# Altium PCB PCB1.PcbDoc
Units mil, origin at the board's own origin, x right, y up, seen from the top; angles counter-clockwise.
Board outline 6000 x 4000 mil, 2 copper layers (Top Layer, Bottom Layer); 4 components, 15 nets, 67 pads, 0 vias.
Unrouted connection lines stored in the file: 8.
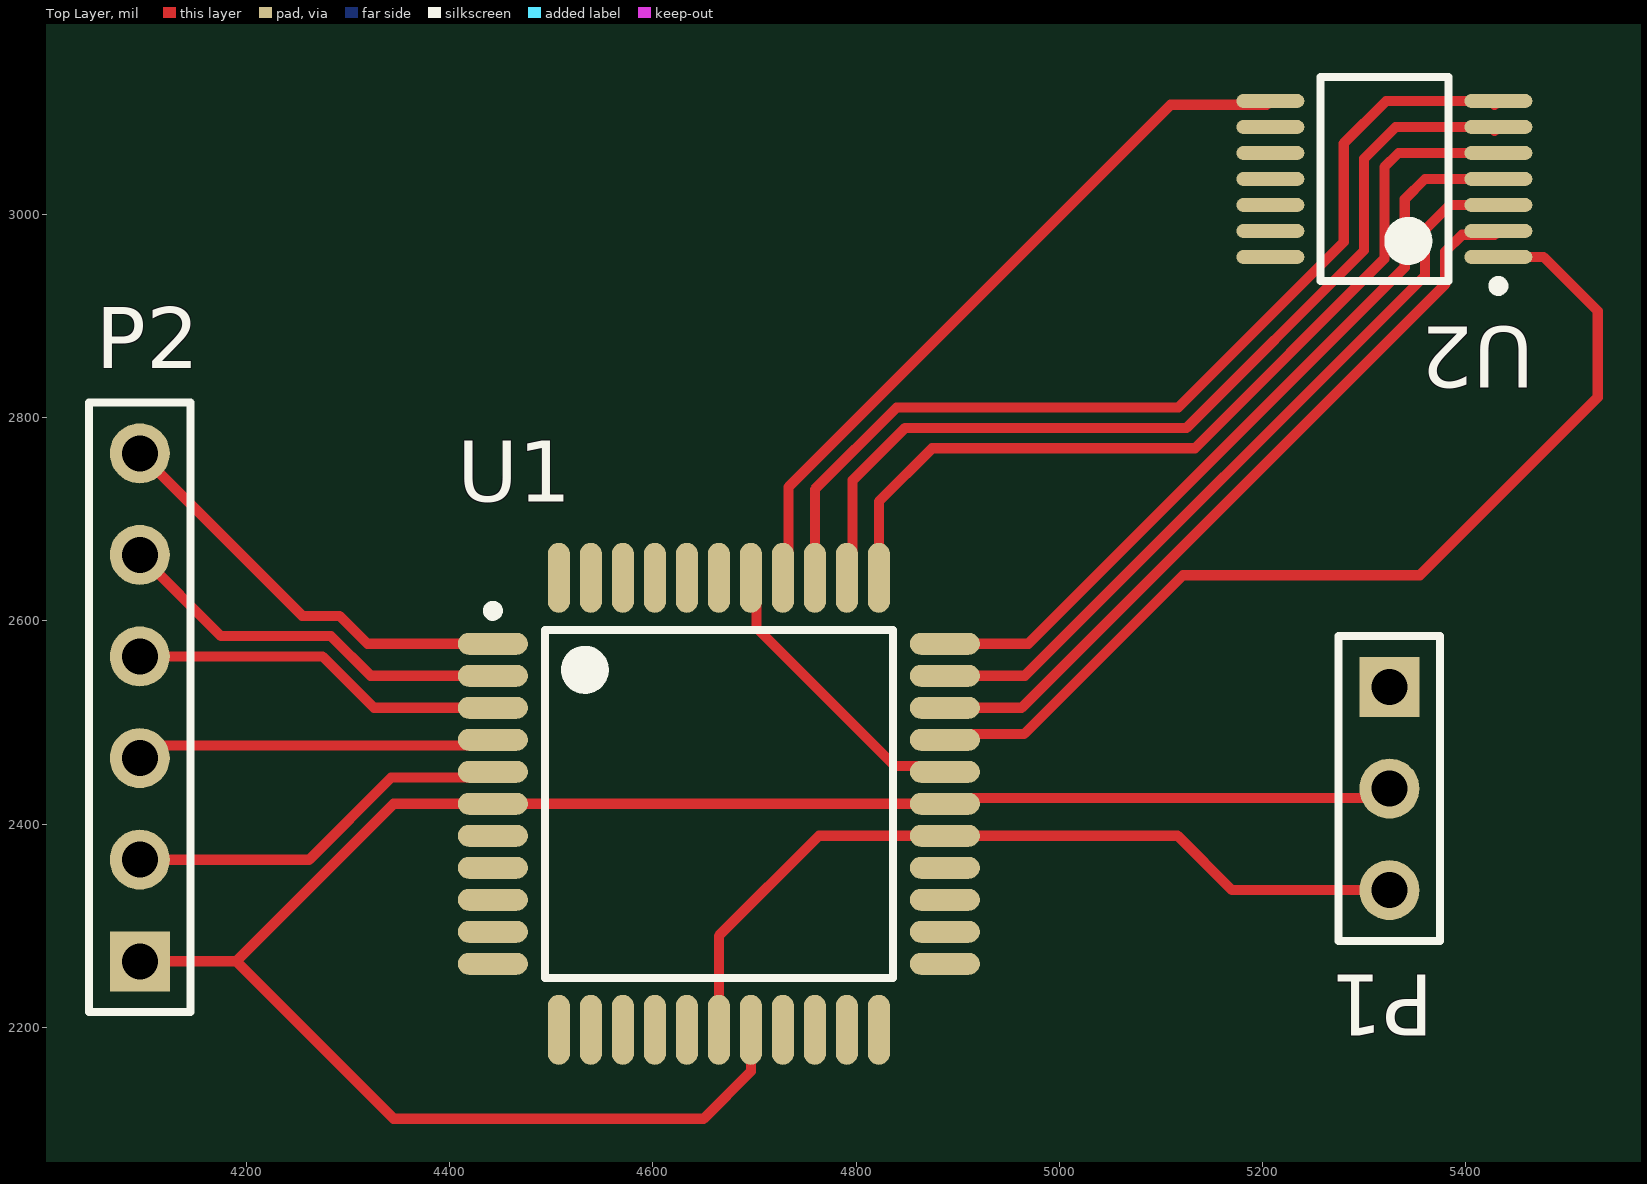
[diagram p0: Top Layer view]
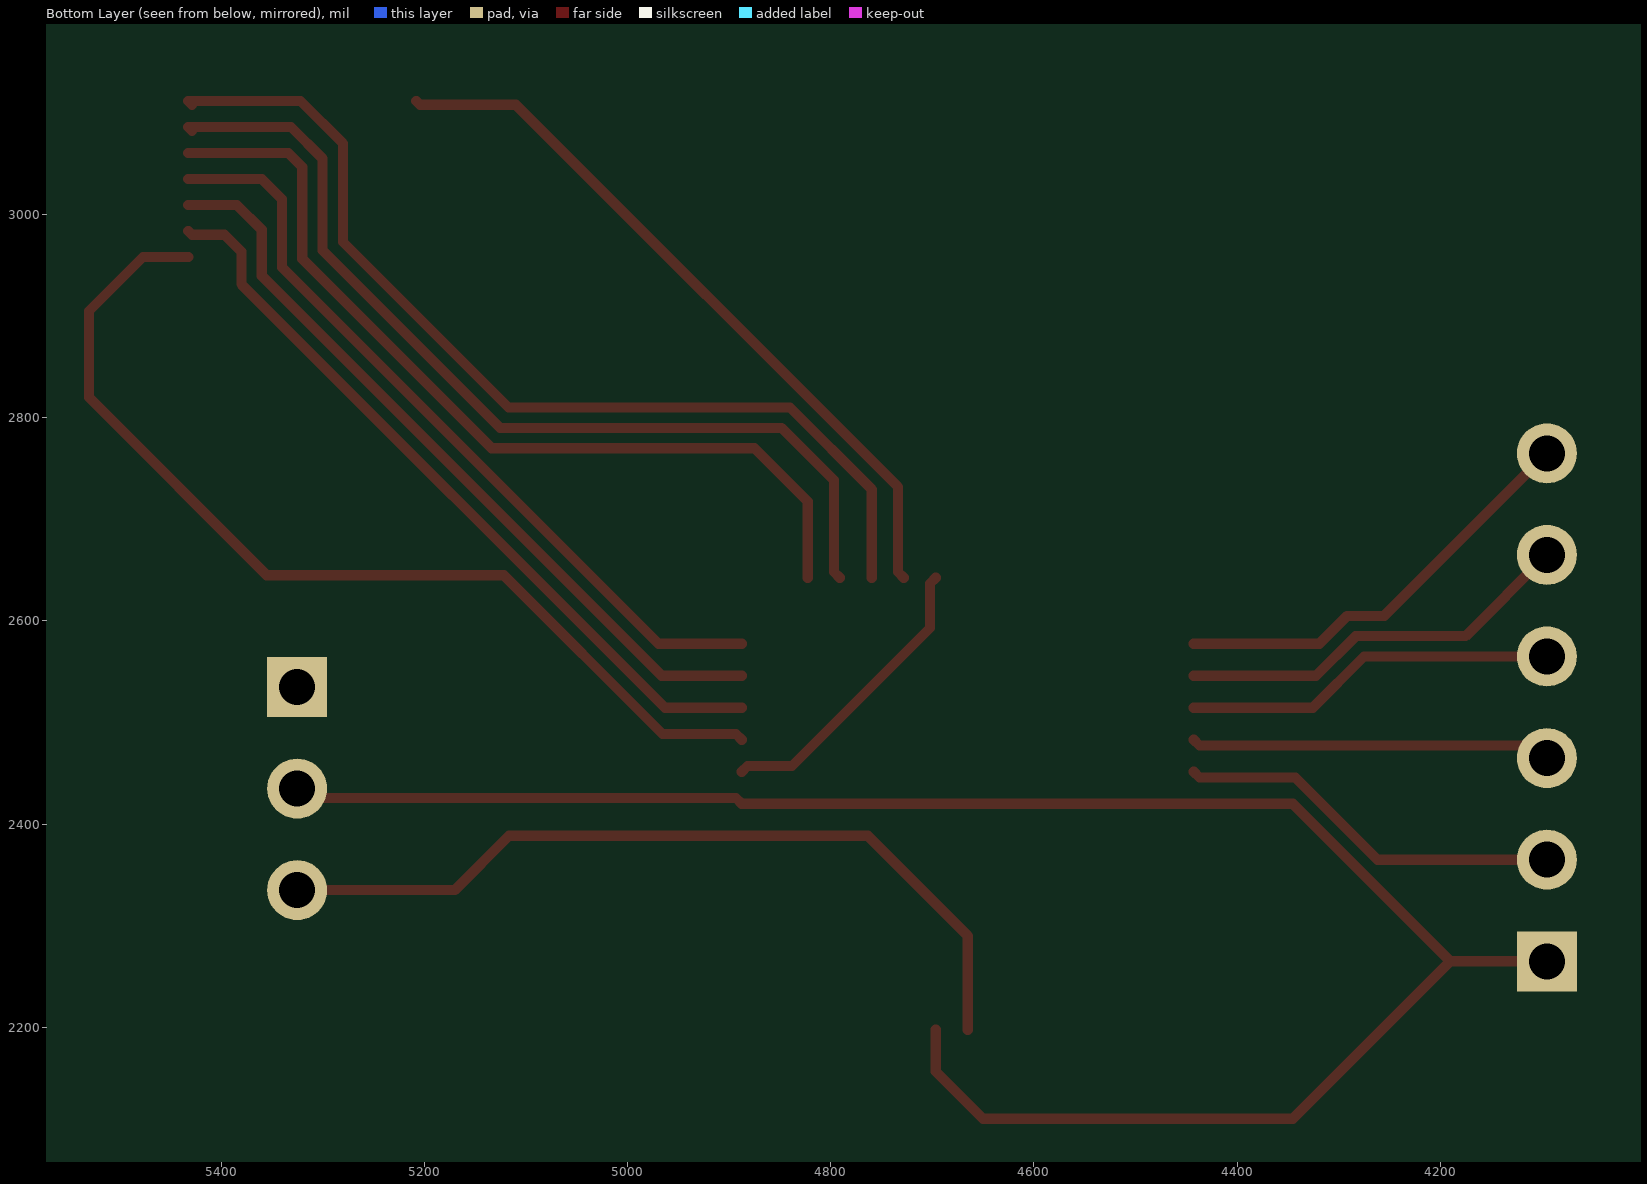
[diagram p1: Bottom Layer view, seen from below]

## Layer stack, top to bottom
Top Solder: solder mask 0.4, Solder Resist, Dk 3.5
Top Layer: signal copper 1.4
Dielectric 1: dielectric 12.6, FR-4, Dk 4.8
Bottom Layer: signal copper 1.4
Bottom Solder: solder mask 0.4, Solder Resist, Dk 3.5

## Board outline
1000,1000 7000,1000 7000,5000 1000,5000

## Design rules (kind name [scope] priority, off if disabled: settings)
Clearance [All] p1: gap=10 ignorepadtopadclearanceinfootprint=FALSE except(0: Arc-Hole Track-Hole SMDPad-Hole THPad-Hole Via-Hole Fill-Hole Poly-Hole Region-Hole Text-Hole)
PolygonConnect [All] p1: connectstyle=Relief reliefconductorwidth=10 reliefentries=4 polygonreliefangle="90 Angle" airgapwidth=10
RoomDefinition Sheet1 [InComponentClass('Sheet1')] p1: confinementstyle=ConfineIn formatcopy=TRUE lockcomponents=FALSE outline 7045,990 8290,990 8290,1710 7045,1710
RoutingVias [All] p1: holewidth=28 width=50 viastyle="Through Hole" minholewidth=28 minwidth=50 maxholewidth=28 maxwidth=50
SolderMaskExpansion [All] p1: expansion=4
Width [All] p1: maxlimit=10 minlimit=10 preferedwidth=10
30 further rules are at their usual default settings.

## Components (designator, comment, footprint, x,y, rotation, side; value= is the part's Value field where it differs from the comment)
P1 "Header 3" HDR1X3 5325,2535 r270 top
P2 "Header 6" HDR1X6 4095,2265 r90 top
U1 "ATmega16-16AC" 44A_N 4665,2420 r0 top
U2 "DAC-8" SOT402-1_N 5320,3035 r180 top

## Footprints (in the part's own frame and the unit in brackets; to place one, negate y for a bottom-side part, rotate by r counter-clockwise, add the part's x,y. Pads: shape width x height; smd on the part's side, far side on the other; paste and mask are expansions set on the pad)
44A_N [mm] "Thin QFP, 44-Leads, Body 10x10mm, Pitch 0.8mm, IPC Medium Density"
  oval 1.75x0.55 smd: 1(-5.65,4) 2(-5.65,3.2) 3(-5.65,2.4) 4(-5.65,1.6) 5(-5.65,0.8) 6(-5.65,0) 7(-5.65,-0.8) 8(-5.65,-1.6) 9(-5.65,-2.4) 10(-5.65,-3.2) 11(-5.65,-4) 23(5.65,-4) 24(5.65,-3.2) 25(5.65,-2.4) 26(5.65,-1.6) 27(5.65,-0.8) 28(5.65,0) 29(5.65,0.8) 30(5.65,1.6) 31(5.65,2.4) 32(5.65,3.2) 33(5.65,4)
  oval 0.55x1.75 smd: 12(-4,-5.65) 13(-3.2,-5.65) 14(-2.4,-5.65) 15(-1.6,-5.65) 16(-0.8,-5.65) 17(0,-5.65) 18(0.8,-5.65) 19(1.6,-5.65) 20(2.4,-5.65) 21(3.2,-5.65) 22(4,-5.65) 34(4,5.65) 35(3.2,5.65) 36(2.4,5.65) 37(1.6,5.65) 38(0.8,5.65) 39(0,5.65) 40(-0.8,5.65) 41(-1.6,5.65) 42(-2.4,5.65) 43(-3.2,5.65) 44(-4,5.65)
  silkscreen extent -5.77,-4.35 4.35,4.95, body extent -5,-5 5,5, height 1.2
HDR1X3 [mm] "Connector; Header; 3 Position"
  rect 1.5x1.5 hole 0.9: 1(0,0)
  round 1.5 hole 0.9: 2(2.54,0) 3(5.08,0)
  silkscreen extent -1.27,-1.27 6.35,1.27
HDR1X6 [mm] "Connector; Header; 6 Position"
  rect 1.5x1.5 hole 0.9: 1(0,0)
  round 1.5 hole 0.9: 2(2.54,0) 3(5.08,0) 4(7.62,0) 5(10.16,0) 6(12.7,0)
  silkscreen extent -1.27,-1.27 13.97,1.27
SOT402-1_N [mm] "TSOP, 14-Leads, Body 5x4.4mm, Pitch 0.65mm, IPC Medium Density"
  oval 1.7x0.35 smd: 1(-2.85,1.95) 2(-2.85,1.3) 3(-2.85,0.65) 4(-2.85,0) 5(-2.85,-0.65) 6(-2.85,-1.3) 7(-2.85,-1.95) 8(2.85,-1.95) 9(2.85,-1.3) 10(2.85,-0.65) 11(2.85,0) 12(2.85,0.65) 13(2.85,1.3) 14(2.85,1.95)
  silkscreen extent -2.98,-2.55 1.6,2.8, body extent -2.25,-2.55 2.25,2.55, height 1.1

## Part data
P1: "Header, 3-Pin", LatestRevisionDate=17-Jul-2002, LatestRevisionNote="Re-released for DXP Platform.", Publisher="Altium Limited"
P2: "Header, 6-Pin", LatestRevisionDate=17-Jul-2002, LatestRevisionNote="Re-released for DXP Platform.", Publisher="Altium Limited"
U1: "8-Bit AVR Microcontroller with 16K Bytes of In-System Programmable Flash Memory", ComponentLink1Description="Manufacturer Link", ComponentLink1URL=http://www.atmel.com, ComponentLink2Description=Datasheet, ComponentLink2URL=http://www.atmel.com/dyn/resources/prod_documents/doc2466.pdf, DatasheetVersion=2466E-AVR-10/02, LatestRevisionDate=13-Apr-2006, LatestRevisionNote="IPC-7351 Footprint Added.", PackageDescription="44-Pin Thin Quad Flat Pack 0.8 mm Pitch", PackageReference=44A, PackageVersion="rev.B, Oct-2001", Published=17-Sep-2003, Publisher="Altium Limited"
U2: "Generic 8-Bit D/A Converter", Code_JEDEC=MO-153, LatestRevisionDate=29-May-2009, LatestRevisionNote="IPC-7351 Footprint Added.", PackageDescription="14-Pin Thin Small Outline Package 0.65 mm Pitch", PackageReference=SOT402-1, PackageVersion=Mar-2002, Published=8-Jun-2000, Publisher="Altium Limited"

## Nets (pads, with @x,y where several pads share a name; then routed paths per layer and width w, separated by ;. In a path a pad name is that pad's centre, name@x,y a point inside that pad or via, vN(x,y) a via of type N, cw(c..) or ccw(c..) an arc to the next point about the centre after c; other vN are vias at no path point)
GND: P1.2 P2.1 U1.6 U1.18 U1.28 U1.39 U2.9 U2.12 | length 1936.9
  Top Layer w10: P2.1 4190,2265 ; U1.18 4696.5,2156.5 4650,2110 4345,2110 4190,2265 ; P1.2 5325,2425.67 4893.11,2425.67 U1.28 U1.6 4345,2420 4190,2265
NetP1_1: P1.1 U2.11
NetP2_3: P2.3 U1.4 | length 355
  Top Layer w10: P2.3 4107.32,2477.32 4436.89,2477.32 U1.4
NetP2_4: P2.4 U1.3 | length 368.5
  Top Layer w10: P2.4 4275,2565 4325.51,2514.49 U1.3
NetP2_5: P2.5 U1.2 | length 396.9
  Top Layer w10: P2.5 4175,2585 4283.28,2585 4322.3,2545.98 U1.2
NetP2_6: P2.6 U1.1 | length 425.2
  Top Layer w10: P2.6 4255,2605 4291.57,2605 4319.09,2577.48 U1.1
NetU1_30: U1.30 U2.1 | length 987
  Top Layer w10: U1.30 4893.11,2488.66 4965.47,2488.66 5121.8,2645 5355,2645 5530,2820 5530,2905 5476.77,2958.23 U2.1
NetU1_31: U1.31 U2.2 | length 758
  Top Layer w10: U1.31 4963.01,2514.49 5380,2931.48 5380,2963.56 5396.56,2980.12 5428.5,2980.12 U2.2
NetU1_32: U1.32 U2.3 | length 763.2
  Top Layer w10: U1.32 4966.22,2545.98 5360,2939.76 5360,2985 5384.41,3009.41 U2.3
NetU1_33: U1.33 U2.4 | length 773.5
  Top Layer w10: U1.33 4969.43,2577.48 5340,2948.05 5340,3015 5360,3035 U2.4
NetU1_34: U1.34 U2.5 | length 879.8
  Top Layer w10: U1.34 4822.48,2717.48 4875,2770 5133.67,2770 5320,2956.33 5320,3046.72 5333.87,3060.59 U2.5
NetU1_35: U1.35 U2.6 | length 936.1
  Top Layer w10: U1.35 4796.65,2648.11 4796.65,2738.37 4848.28,2790 5125.38,2790 5300,2964.62 5300,3055 5331.18,3086.18 U2.6 U2.6@5428.5,3082.48
NetU1_36: U1.36 U2.7 | length 980.2
  Top Layer w10: U1.36 4759.49,2729.49 4840,2810 5117.1,2810 5280,2972.9 5280,3070 5321.77,3111.77 U2.7 U2.7@5428.5,3108.07
NetU1_37: U1.37 U2.8 | length 723.3
  Top Layer w10: U1.37 4733.66,2648.11 4733.66,2731.95 5109.79,3108.07 5204.09,3108.07 U2.8
VCC: P1.3 P2.2 U1.5 U1.17 U1.27 U1.29 U1.38 U2.10 U2.13 | length 1494.5
  Top Layer w10: P2.2 4261.72,2365 4342.54,2445.83 4436.89,2445.83 U1.5 ; U1.17 4665,2290 4763.5,2388.5 U1.27 5116.5,2388.5 5170,2335 P1.3 ; U1.38 4702.17,2636.77 4702.17,2592.99 4837.99,2457.17 4881.77,2457.17 U1.29
pads on no net: U1.7 U1.8 U1.9 U1.10 U1.11 U1.12 U1.13 U1.14 U1.15 U1.16 U1.19 U1.20 U1.21 U1.22 U1.23 U1.24 U1.25 U1.26 U1.40 U1.41 U1.42 U1.43 U1.44 U2.14